# Altium PCB ESP32SSMB V1.2 .PcbDoc (part 2 of 2)
Units mm, origin at the board's own origin, x right, y up, seen from the top; angles counter-clockwise.
Board outline 38.38 x 27.81 mm, 2 copper layers (Top Layer, Bottom Layer), stack 1.571 mm thick; 72 components, 61 nets, 251 pads, 45 vias.
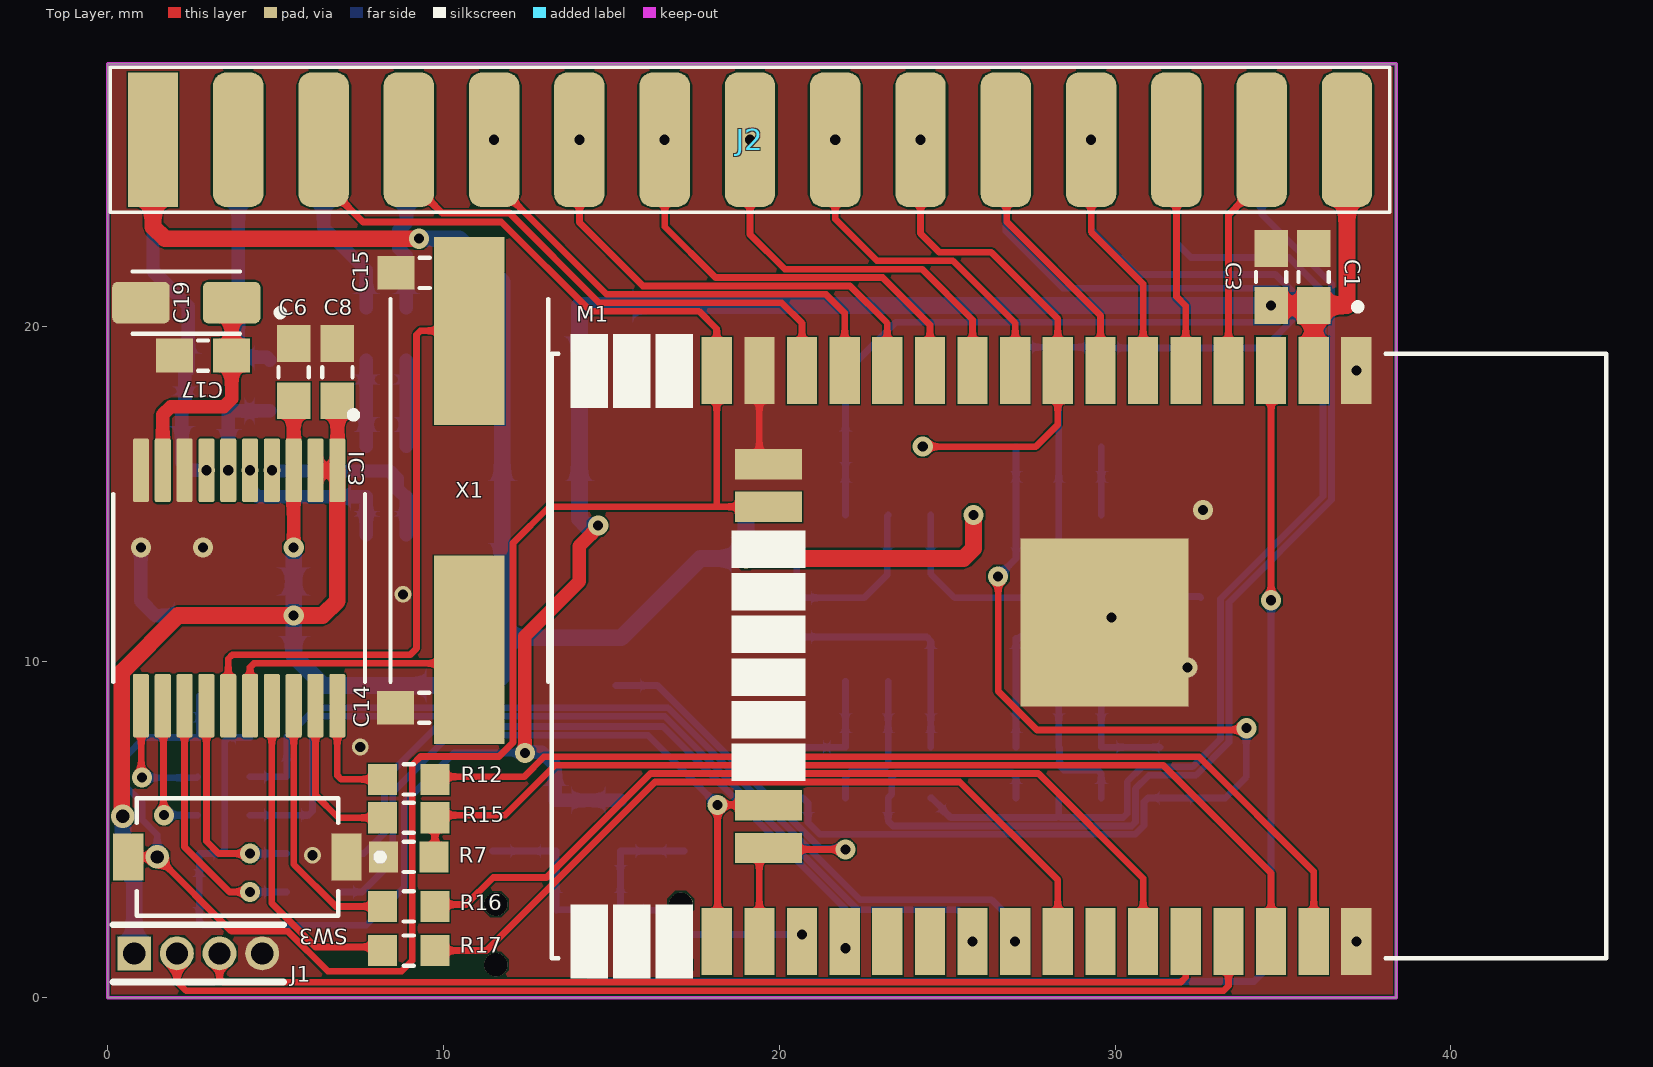
[diagram p0: Top Layer view]

## Part data (continued)
SW3: library part "BUT; SW; SMD; PTS636SM50JSMTRLFS", "Switch Tactile N.O. SPST Rectangular Button J-Bend 0.05A 12VDC 1.77N SMD T/R", Contact Resistance=100mR, Manufacturer="ITT C&K", Manufacturer Part Number=PTS636SM50JSMTRLFS, Supplier Part Number=CKN12319-1-ND, Category="Tactile Switches", ComponentLink1Description="Link Digikey", ComponentLink1URL=https://www.digikey.com/en/products/detail/c-k/PTS636-SM50J-SMTR-LFS/10071732, Number of Positions=2NUMBER, Pricing="1=0.21, 10=0.199, 25=0.1888, 100=0.1717, 250=0.1614, 500=0.14766 (USD)", RoHS=No, Stock=80725, Supplier=Digikey
X1: library part "OSC; 3.58M; 3.579545M; ABLS-3.579545MHZ-B2-T", "Crystal 3.579545MHz ±20ppm (Tol) ±50ppm (Stability) 18pF FUND 180Ohm 2-Pin HC-49/US SMD T/R", Manufacturer=Abracon, Manufacturer Part Number=ABLS-3.579545MHZ-B2-T, Supplier Part Number=535-9081-1-ND, Category=Crystals, ComponentLink1Description=https://datasheet.ciiva.com/15116/getdatasheetpartid-719903-15116782.pdf?src-supplier=Verical, ComponentLink1URL=https://datasheet.ciiva.com/15116/getdatasheetpartid-719903-15116782.pdf?src-supplier=Verical, ComponentLink2Description=https://datasheet.ciiva.com/16410/abls-16410837.pdf?src-supplier=Future+Electronics, ComponentLink2URL=https://datasheet.ciiva.com/16410/abls-16410837.pdf?src-supplier=Future+Electronics, ComponentLink3Description=https://datasheet.ciiva.com/854/abls-854273.pdf?src-supplier=Digikey, ComponentLink3URL=https://datasheet.ciiva.com/854/abls-854273.pdf?src-supplier=Digikey, ComponentLink4Description=https://datasheet.ciiva.com/854/abls-854274.pdf?src-supplier=Digikey, ComponentLink4URL=https://datasheet.ciiva.com/854/abls-854274.pdf?src-supplier=Digikey, ComponentLink5Description=https://datasheet.ciiva.com/854/abls-854275.pdf?src-supplier=Digikey, ComponentLink5URL=https://datasheet.ciiva.com/854/abls-854275.pdf?src-supplier=Digikey, ComponentLink6Description=https://datasheet.ciiva.com/4945/abls-44621-4945006.pdf?src-supplier=Mouser, ComponentLink6URL=https://datasheet.ciiva.com/4945/abls-44621-4945006.pdf?src-supplier=Mouser, ComponentLink7Description=https://datasheet.ciiva.com/7998/abls-7998431.pdf?src-supplier=Element14, ComponentLink7URL=https://datasheet.ciiva.com/7998/abls-7998431.pdf?src-supplier=Element14, ComponentLink8Description="Link Digikey", ComponentLink8URL=https://www.digikey.com/en/products/detail/abracon-llc/ABLS-3-579545MHZ-B2-T/675276, Designer=TVBac, Pricing="1=0.27, 10=0.231, 50=0.208, 100=0.1989, 500=0.17934, 1000=0.17152, 2000=0.16407, 3000=0.15987, 5000=0.15474, 7000=0.15146, 10000=0.14806, 25000=0.13969, 50000=0.13369 (USD)", RoHS=Yes, Stock=16401, Supplier=Digikey
J2: Designer=TVBac, System=Connector

## Via types
v1: diameter 0.6, hole 0.3, Top Layer to Bottom Layer, tented both sides, 35 vias
v2: diameter 0.5, hole 0.3, Top Layer to Bottom Layer, tented both sides, 8 vias
v3: diameter 0.7, hole 0.4, Top Layer to Bottom Layer, 2 vias

## Nets (pads, with @x,y where several pads share a name; then routed paths per layer and width w, separated by ;. In a path a pad name is that pad's centre, name@x,y a point inside that pad or via, vN(x,y) a via of type N, cw(c..) or ccw(c..) an arc to the next point about the centre after c; other vN are vias at no path point)
3V3-ESP: C1.2 C3.2 IC2.2 IC2.4 J2.29 M1.2 R1.2 R2.2 R3.1 R4.2 R6.1 | length 68.7
  Top Layer w0.4: v1(12.421,7.29) 12.421,10.77 14.046,12.395 14.046,13.454 14.605,14.013 v1(14.605,14.067)
  Top Layer w0.5: v1(34.646,20.613) C1.2 ; M1.2 C1.2 ; J2.29 36.906,20.613 C1.2
  Bottom Layer w0.2: R3.1 3.363,4.293 3.48,4.41 3.48,7.63 3.597,7.747 R4.2 ; R3.1@2.727,4.297 R6.1 2.727,2.276 2.844,2.159 7.696,2.159 8.838,3.301 8.838,5.816 10.312,7.29 v1(12.421,7.29)
  Bottom Layer w0.4: v1(12.421,7.29) 12.449,7.319 12.922,7.319 13.327,6.914 13.327,5.879 R2.2
  Bottom Layer w0.5: v1(14.605,14.067) 14.246,14.067 14.046,14.267 14.046,14.478 IC2.4 v1(34.646,20.613)
5V-ESP: C5.2 C6.2 C7.1 C8.2 C9.1 D1.1 IC1.4 IC2.3 IC3.1 IC3.2 IC3.3 J1.01 J2.01 R32.2 | length 79.4
  Top Layer w0.4: v1(5.537,13.411) IC3.3 C6.2 ; IC3.2 IC3.1 C8.2
  Top Layer w0.5: v3(0.45,5.41) 0.416,5.444 0.416,9.707 2.088,11.379 v1(5.537,11.379) 6.401,11.379 6.837,11.815 IC3.1 ; J2.01 1.346,22.957 1.698,22.606 v1(9.271,22.606) ; v1(19.006,13.081) 25.488,13.081 25.781,13.374 v1(25.781,14.376)
  Bottom Layer w0.5: v3(0.45,5.41) 0.45,3.857 0.787,3.52 J1.01 ; v1(5.537,13.411) v1(5.537,11.379) 5.537,10.185 6.425,9.297 D1.1 ; v1(9.271,22.606) 10.465,22.606 11.746,21.325 IC2.3 11.746,10.719 ; D1.1@10.225,9.271 11.453,9.271 11.746,9.564 11.746,10.719 ; C5.2 v1(19.006,13.081) 17.653,13.081 15.291,10.719 11.746,10.719
ADE-C\S\: M1.31 R17.2 | length 23.7
  Top Layer w0.2: R17.2 11.274,1.403 16.296,6.426 25.375,6.426 28.296,3.505 M1.31
ADE-CF: M1.30 R11.2 R22.2 | length 27.5
  Bottom Layer w0.2: R22.2 R11.2 5.327,7.765 6.198,8.636 16.68,8.636 22.395,2.921 26.314,2.921 27.026,2.21 v1(27.026,1.676)
ADE-I\Q\R\: IC3.14 R3.2 R18.1 | length 6.6
  Top Layer w0.2: IC3.14 2.937,4.658 3.302,4.293 v1(4.237,4.293)
  Bottom Layer w0.2: v1(4.237,4.293) R18.1
ADE-MISO: M1.36 R7.2 R15.2 | length 30.2
  Top Layer w0.2: R7.2@9.718,4.115 9.743,4.14 R15.2 9.819,5.436 11.836,5.436 13.327,6.926 31.428,6.926 34.646,3.708 M1.36
ADE-MOSI: M1.37 R12.2 | length 30
  Top Layer w0.2: R12.2 9.819,6.579 12.395,6.579 12.993,7.176 32.499,7.176 35.916,3.759 M1.37
ADE-S\A\G\: IC3.13 R6.2 R20.1 | length 7.8
  Top Layer w0.2: IC3.13 2.287,4.491 3.628,3.15 v1(4.237,3.15)
  Bottom Layer w0.2: v1(4.237,3.15) R20.1
ADE-SCLK: M1.33 R16.2 | length 25.9
  Top Layer w0.2: R16.2 9.798,2.773 10.673,2.773 11.481,3.581 13.066,3.581 16.161,6.676 27.715,6.676 30.836,3.556 M1.33
ADE-ZX: M1.29 R8.2 R21.2 | length 27.4
  Bottom Layer w0.2: R21.2 R8.2 5.979,5.436 6.096,5.553 6.096,8.18 6.298,8.382 16.58,8.382 22.346,2.616 25.324,2.616 25.756,2.184 v1(25.756,1.676)
BOOT: C4.2 M1.25 R2.1 SW2.12 | length 9.4
  Bottom Layer w0.2: C4.2 R2.1 SW2.12 16.466,2.605 17.191,1.88 v1(20.676,1.88)
CUR-SHT-N-ESP: J2.06 R13.1 | length 5.5
  Bottom Layer w0.4: J2.06 6.426,22.936 7.696,21.666 R13.1
CUR-SHT-P-ESP: J2.08 R9.1 | length 5.2
  Bottom Layer w0.4: R9.1 8.89,22.098 8.671,22.317 8.671,22.855 8.89,23.074 8.89,25.476 J2.08
ESP-BUT: C21.2 J2.05 M1.16 R4.1 SW3.2 | length 60.3
  Top Layer w0.2: SW3.2 v3(1.473,4.191) 3.688,1.976 5.367,1.976 6.554,0.788 8.747,0.788 9.068,1.109 9.068,6.94 9.313,7.185 11.653,7.185 12.071,7.602 12.071,13.544 13.148,14.621 18.196,14.621 ; J2.05 6.426,24.282 7.603,23.106 11.717,23.106 14.376,20.447 17.602,20.447 18.136,19.914 18.136,18.676 18.136,14.681 18.196,14.621 ; M1.16@19.676,14.621 18.196,14.621
  Bottom Layer w0.2: v3(1.473,4.191) 1.473,4.851 1.016,5.309 1.016,5.817 0.533,6.299 0.533,7.188 1.092,7.747 R4.1 C21.2
ESP-I\Q\R\: M1.26 R18.2 | length 21
  Bottom Layer w0.2: R18.2 7.622,4.293 8.238,4.909 8.238,6.511 9.804,8.077 16.531,8.077 21.971,2.638 v1(21.971,1.473)
ESP-IO12: J2.07 M1.14 | length 16.1
  Top Layer w0.2: J2.07 8.966,24.359 9.957,23.368 11.963,23.368 14.632,20.699 20.068,20.699 20.676,20.091 M1.14
ESP-IO14: J2.09 J2.10 M1.13 | length 15
  Top Layer w0.2: v1(11.506,25.552) 11.506,24.302 14.86,20.949 21.393,20.949 21.946,20.396 M1.13
ESP-IO25: J2.15 J2.16 M1.10 | length 12
  Top Layer w0.2: v1(19.126,25.552) 19.126,22.733 20.16,21.699 24.25,21.699 25.756,20.193 M1.10
ESP-IO26: J2.13 J2.14 M1.11 | length 13.1
  Top Layer w0.2: v1(16.586,25.552) 16.586,22.962 18.099,21.449 23.077,21.449 24.486,20.041 M1.11
ESP-IO27: J2.11 J2.12 M1.12 | length 14.3
  Top Layer w0.2: v1(14.046,25.552) 14.046,23.089 15.936,21.199 22.108,21.199 23.216,20.091 M1.12
ESP-IO33: J2.17 J2.18 M1.9 | length 10.4
  Top Layer w0.2: v1(21.666,25.552) 21.666,23.19 22.907,21.949 25.168,21.949 27.026,20.091 M1.9
ESP-IO35: J2.21 M1.7 | length 8
  Top Layer w0.2: J2.21@26.772,25.527 26.772,23.114 29.566,20.32 M1.7
ESP-S\A\G\: M1.23 R20.2 | length 20.9
  Top Layer w0.2: M1.23@18.136,1.676 18.161,1.701 v1(18.161,5.74) 19.666,5.74 M1.23@19.676,5.731
  Bottom Layer w0.2: R20.2 7.569,3.15 8.488,4.069 8.488,6.126 10.177,7.815 16.086,7.815 v1(18.161,5.74)
ESP-VN: J2.25 M1.5 | length 7
  Top Layer w0.2: J2.25 31.826,20.879 32.106,20.599 M1.5
ESP-VP: J2.27 M1.4 | length 7.3
  Top Layer w0.2: M1.4 33.376,23.312 34.366,24.302 J2.27
GND-ESP: C1.1 C2.1 C3.1 C4.1 C5.1 C6.1 C7.2 C8.1 C9.2 C10.1 C11.1 C12.1 C13.1 C14.1 C15.2 C17.1 C18.1 C19.2 C20.1 C21.1 D1.3 IC1.11 IC2.1 IC3.8 IC3.10 J1.04 J2.30 M1.1 M1.15 M1.38 M1.39 R7.1 R8.1 R11.1 R23.1 R31.1 R34.2 R38.1 R41.1 R44.2 SW1.12 SW1.21 SW1.22 SW2.11 SW2.21 SW2.22 SW3.1 | length 6.5
  Top Layer w0.2: M1.15@19.406,18.676 19.406,16.161 M1.15@19.676,15.891
  Bottom Layer w0.4: v1(0.991,13.411) 0.987,13.407 0.987,11.815 1.422,11.379 C9.2 ; v1(2.837,13.411) C7.2@2.845,13.411
  other v1: 37.186,1.676 32.156,9.83 32.614,14.529 37.186,18.676
  other v2: 6.096,4.242 7.518,7.468 29.896,11.328 8.795,12.014
LD-IN1: J2.28 R28.1 R43.1 | length 37.7
  Bottom Layer w0.2: R43.1 27.051,6.575 26.934,6.692 23.47,6.692 23.352,6.575 23.352,6.062 R28.1 23.241,5.258 23.383,5.116 30.494,5.116 30.611,5.233 30.611,6.227 31.01,6.626 32.406,6.626 33.391,7.61 33.391,11.775 36.445,14.83 36.445,21.264 34.366,23.343 J2.28
LD-IN2: J2.26 R33.1 R39.1 | length 33.6
  Bottom Layer w0.2: R33.1 24.541,5.951 24.876,5.616 24.876,5.586 25.096,5.366 28.255,5.366 28.321,5.432 ; R39.1 28.321,5.432 ; J2.26 31.826,22.479 32.258,22.047 35.179,22.047 36.195,21.031 36.195,14.935 33.141,11.881 33.141,7.714 32.303,6.876 30.802,6.876 30.361,6.434 30.361,5.483 30.244,5.366 28.387,5.366 28.321,5.432
LEAK: C20.2 D2.K D3.K IC1.6 J2.23 J2.24 M1.6 R37.1 R41.2 | length 37.9
  Top Layer w0.2: v1(29.286,25.552) 29.286,22.809 30.836,21.26 M1.6
  Bottom Layer w0.2: D2.K 28.321,19.375 ; v1(29.286,25.552) 29.286,22.885 30.632,21.539 34.78,21.539 35.396,20.924 35.396,20.302 34.446,19.353 31.369,19.353 29.614,19.353 D3.K 28.321,19.375 ; R37.1 32.517,11.951 31.93,11.951 31.852,12.03 31.852,12.878 31.674,13.056 31.071,13.056 R41.2 28.438,13.081 28.321,13.198 IC1.6 28.321,19.375
LEAK_INT: J2.19 J2.20 M1.8 R36.2 R38.2 | length 15.4
  Top Layer w0.2: v1(24.206,25.552) 24.206,22.765 24.773,22.199 26.315,22.199 28.296,20.218 28.296,19.226 M1.8 28.296,17.069 27.64,16.413 v1(24.271,16.413)
NetC10_2: C10.2 R9.2 R10.1 | length 2.6
  Bottom Layer w0.4: R10.1 C10.2 R9.2
NetC11_2: C11.2 IC3.4 R10.2 | length 5.6
  Bottom Layer w0.4: v2@4.908,15.687 4.909,15.689 4.933,15.689 4.935,15.687 8.391,15.687 8.625,15.453 8.625,15.152 8.86,14.917 R10.2 C11.2
  other v2: 4.887,15.708
NetC12_2: C12.2 R13.2 R14.1 | length 2.6
  Bottom Layer w0.4: R14.1 C12.2 R13.2
NetC13_2: C13.2 IC3.5 R14.2 | length 5.2
  Bottom Layer w0.4: v2(4.237,15.708) 4.237,15.151 4.471,14.917 R14.2 C13.2
NetC14_2: C14.2 IC3.16 X1.1 | length 7.9
  Top Layer w0.2: IC3.16 4.237,9.84 4.354,9.957 10.363,9.957 X1.1
NetC15_1: C15.1 IC3.15 X1.2 | length 18.1
  Top Layer w0.2: IC3.15 3.587,10.094 3.704,10.211 9,10.211 9.195,10.405 9.195,19.746 9.312,19.863 X1.2
NetC16_2: C16.2 IC3.6 R19.2 | length 3
  Bottom Layer w0.4: v2(3.587,15.708) C16.2 R19.2
NetC17_2: C17.2 C19.1 IC3.9 | length 6.6
  Top Layer w0.4: IC3.9 1.637,17.368 1.871,17.602 3.452,17.602 3.687,17.837 C17.2 ; C17.2@3.687,19.333 C19.1
NetD2_A: D2.A IC1.5 R30.2 R42.2 | length 32
  Top Layer w0.2: v1(26.518,12.548) 26.518,9.132 27.674,7.976 33.858,7.976 v1(33.909,8.026)
  Bottom Layer w0.2: R30.2@20.701,5.951 20.855,5.796 20.855,5.219 21.208,4.866 30.597,4.866 30.861,5.129 30.861,5.833 30.978,5.951 R42.2 33.281,5.951 33.909,6.579 v1(33.909,8.026) ; v1(26.518,12.548) 27.051,13.081 IC1.5 D2.A@27.051,16.413
NetD3_A: D3.A IC1.7 | length 2
  Bottom Layer w0.2: IC1.7 D3.A@29.591,16.413
NetIC1_2: IC1.2 R31.2 R32.1 | length 5.9
  Bottom Layer w0.2: R32.1 20.516,11.908 22.525,11.908 23.217,12.6 23.217,14.352 IC1.2
NetIC1_3: IC1.3 R37.2 | length 8.6
  Bottom Layer w0.2: IC1.3 24.511,12.624 25.222,11.913 R37.2
NetIC1_8: IC1.8 R40.2 R42.1 | length 3.7
  Bottom Layer w0.2: IC1.8 R40.2 R42.1@31.347,7.461
NetIC1_9: IC1.9 R39.2 R40.1 | length 4.6
  Bottom Layer w0.2: IC1.9 R39.2 28.346,7.435 28.346,6.909 28.473,6.782 29.474,6.782 29.591,6.665 R40.1
NetIC1_10: IC1.10 R43.2 R44.1 | length 7.3
  Bottom Layer w0.2: R43.2 27.051,10.703 ; 27.051,10.627 27.168,10.744 R44.1
NetIC1_12: IC1.12 R33.2 R34.1 | length 7.2
  Bottom Layer w0.2: R34.1 24.394,10.744 24.511,10.627 R33.2
NetIC1_13: IC1.13 R28.2 R29.1 | length 4.5
  Bottom Layer w0.2: R29.1 21.971,6.579 22.174,6.782 23.089,6.782 23.241,6.934 R28.2 IC1.13
NetIC1_14: IC1.14 R29.2 R30.1 | length 3.2
  Bottom Layer w0.2: R30.1@20.701,7.461 R29.2 IC1.14
NetIC3_11: IC3.11 R22.1 | length 3.8
  Top Layer w0.2: IC3.11 0.993,8.691 0.993,6.576 v1(1.016,6.553)
  Bottom Layer w0.2: v1(1.016,6.553) 2.651,6.553 R22.1
NetIC3_12: IC3.12 R21.1 | length 4.3
  Top Layer w0.2: IC3.12 1.657,8.678 1.657,5.455 v1(1.676,5.436)
  Bottom Layer w0.2: v1(1.676,5.436) R21.1
NetIC3_17: IC3.17 R17.1 | length 9.8
  Top Layer w0.2: IC3.17 4.887,2.81 6.185,1.511 8.075,1.511 R17.1
NetIC3_18: IC3.18 R16.1 | length 7.9
  Top Layer w0.2: IC3.18 5.537,3.972 6.79,2.718 R16.1
NetIC3_19: IC3.19 R15.1 | length 4.9
  Top Layer w0.2: IC3.19 6.187,6.035 6.862,5.359 R15.1
NetIC3_20: IC3.20 R12.1 | length 3.5
  Top Layer w0.2: IC3.20 6.837,6.62 6.954,6.502 R12.1
OFF_RELAY: IC1.1 J2.22 R36.1 | length 30.5
  Bottom Layer w0.2: IC1.1 R36.1 21.971,18.618 23.466,20.113 34.853,20.113 35.146,20.406 35.146,20.82 34.833,21.133 28.448,21.133 26.746,22.835 J2.22
POWER_L_D: C16.1 J2.04 R19.1 | length 7.4
  Bottom Layer w0.4: C16.1@3.587,19.08 4.731,19.08 R19.1 ; C16.1@3.886,19.4 J2.04
POWER_N_D: C18.2 IC3.7 J2.02 R23.2 | length 11
  Bottom Layer w0.4: J2.02 1.346,21.644 2.393,20.598 C18.2 ; C18.2@2.298,18.739 2.298,17.57 R23.2 2.203,15.943 2.437,15.708 v2(2.937,15.708)
RESET: C2.2 M1.3 R1.1 SW1.11 | length 44.8
  Top Layer w0.2: v1(34.646,11.836) M1.3
  Bottom Layer w0.2: C2.2 R1.1 SW1.11 13.369,2.616 14.097,2.616 14.302,2.411 14.302,0.684 14.507,0.48 34.135,0.48 34.646,0.991 v1(34.646,11.836)
RXD0: J1.03 M1.34 | length 30.7
  Top Layer w0.2: J1.03 3.327,0.574 3.445,0.457 31.953,0.457 32.106,0.61 M1.34
TXD0: J1.02 M1.35 | length 33.7
  Top Layer w0.2: J1.02 2.057,0.483 2.333,0.207 33.227,0.207 33.376,0.356 M1.35
WS2812: D1.4 M1.24 | length 14.1
  Top Layer w0.2: M1.24@19.406,1.676 19.406,4.191 19.676,4.461 19.721,4.416 v1(21.971,4.416)
  Bottom Layer w0.2: D1.4 16.373,9.297 21.224,4.445 21.942,4.445 v1(21.971,4.416)
pads on no net: D1.2 J2.03 M1.27 M1.28 M1.32 SW1. SW2.

## Polygon pours and split planes (outlines as drawn)
GND-ESP on Top Layer "PLG" (solid, pour order 1): 0,27.813 0,0 38.379,0 38.379,27.813
GND-ESP on Bottom Layer "PLG" (solid, pour order 0): 0,27.813 0,0 38.379,0 38.379,27.813

## Keep-outs
Keep-Out Layer:
  the board outline again, w0.1

## Silkscreen, mask and mechanical layers (free items; w line width, h text height)
Bottom Overlay:
  drawing of 16 lines, arcs and shapes, not listed
  text "TVBac" at 33.884,5.141 h1.5 r180

## Text inside footprints (layer, text, board x,y; h text height)
M1: Mechanical 13 "ANTENNA" at 40.826,13.876 h1.27 r270